# Altium PCB PCB_prod_disaster_counter_2_50_radius_2022-07-22.pcbdoc
Units mil, origin at the board's own origin, x right, y up, seen from the top; angles counter-clockwise.
Board outline 7840 x 6480 mil, 2 copper layers (Top Layer, Bottom Layer); 33 components, 24 nets, 108 pads, 4 vias.
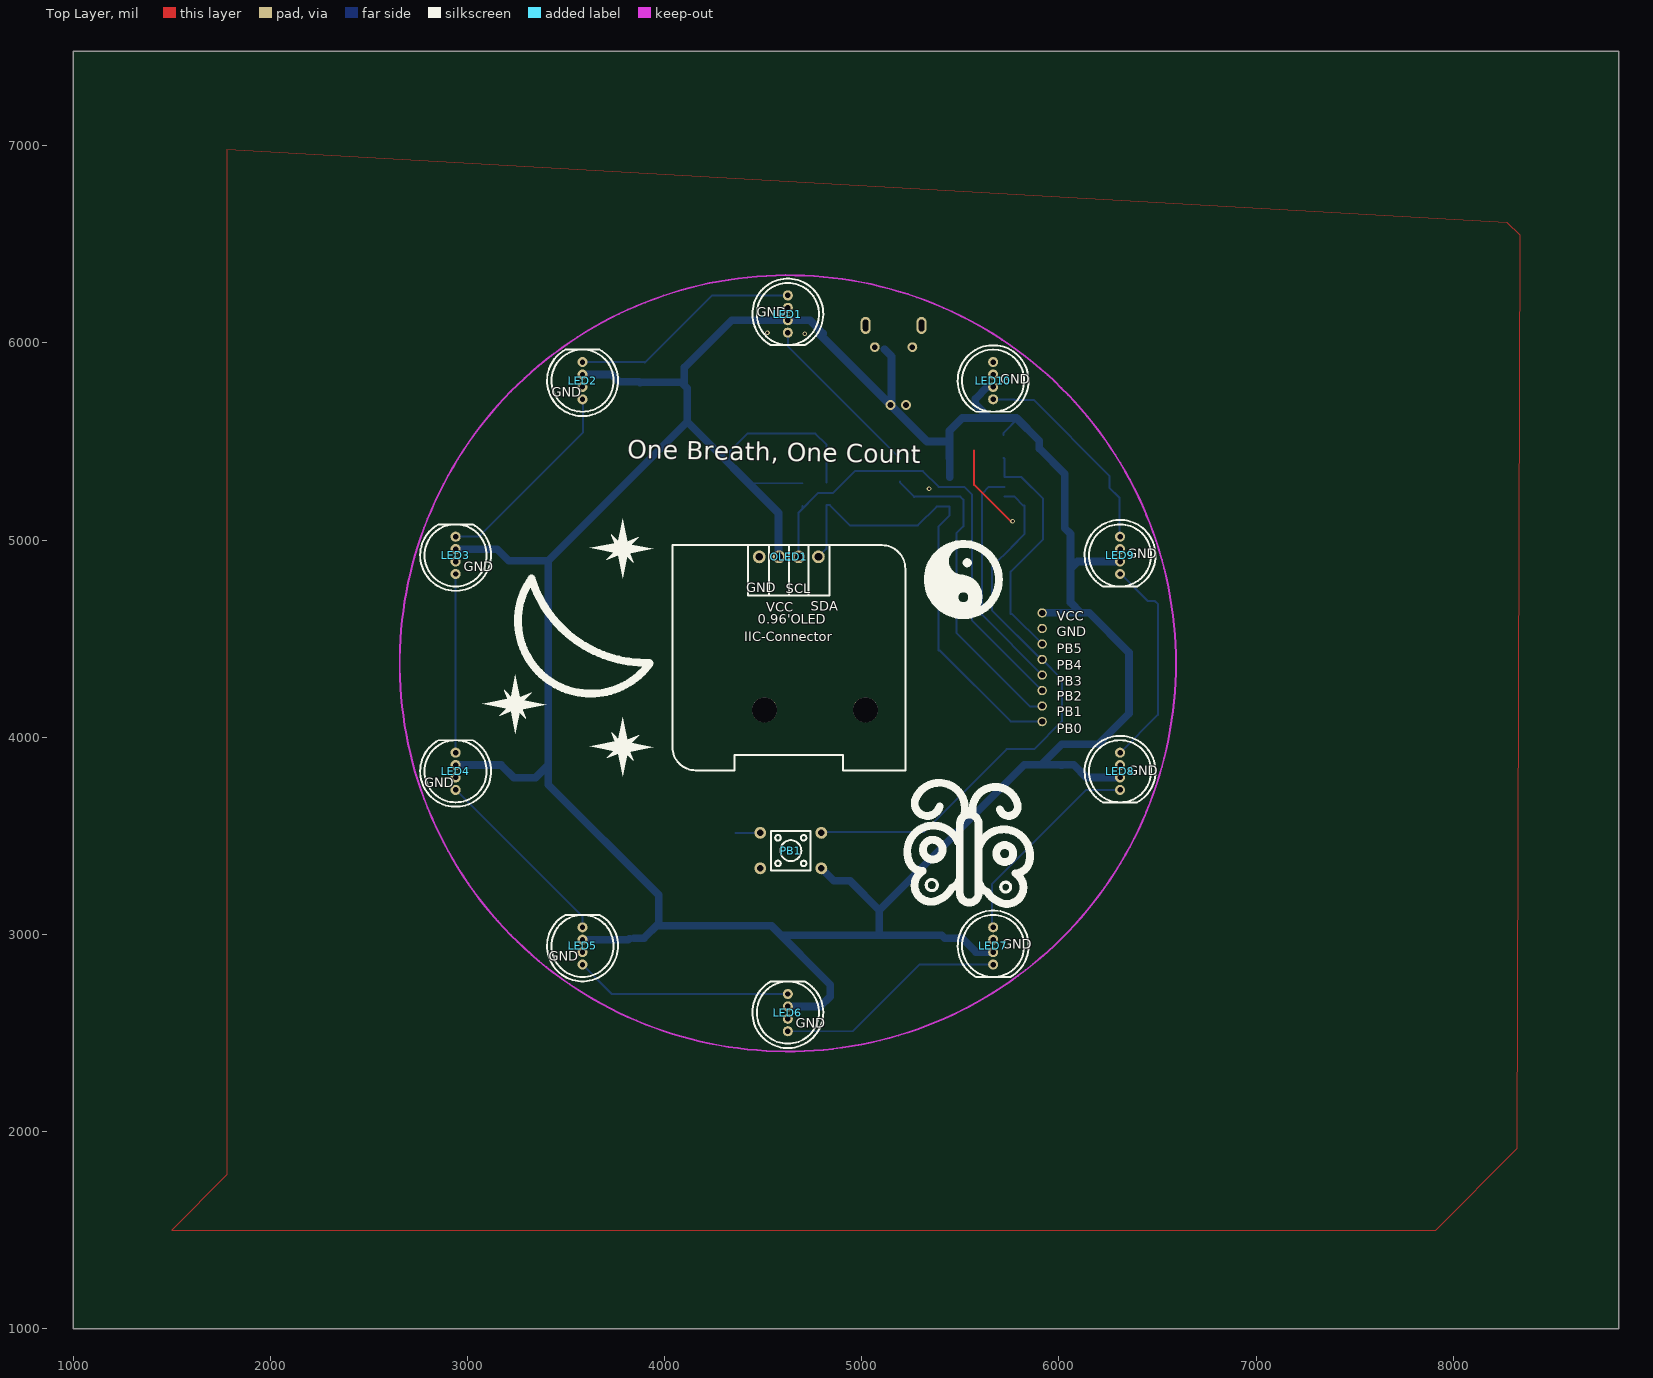
[diagram p0: Top Layer view]
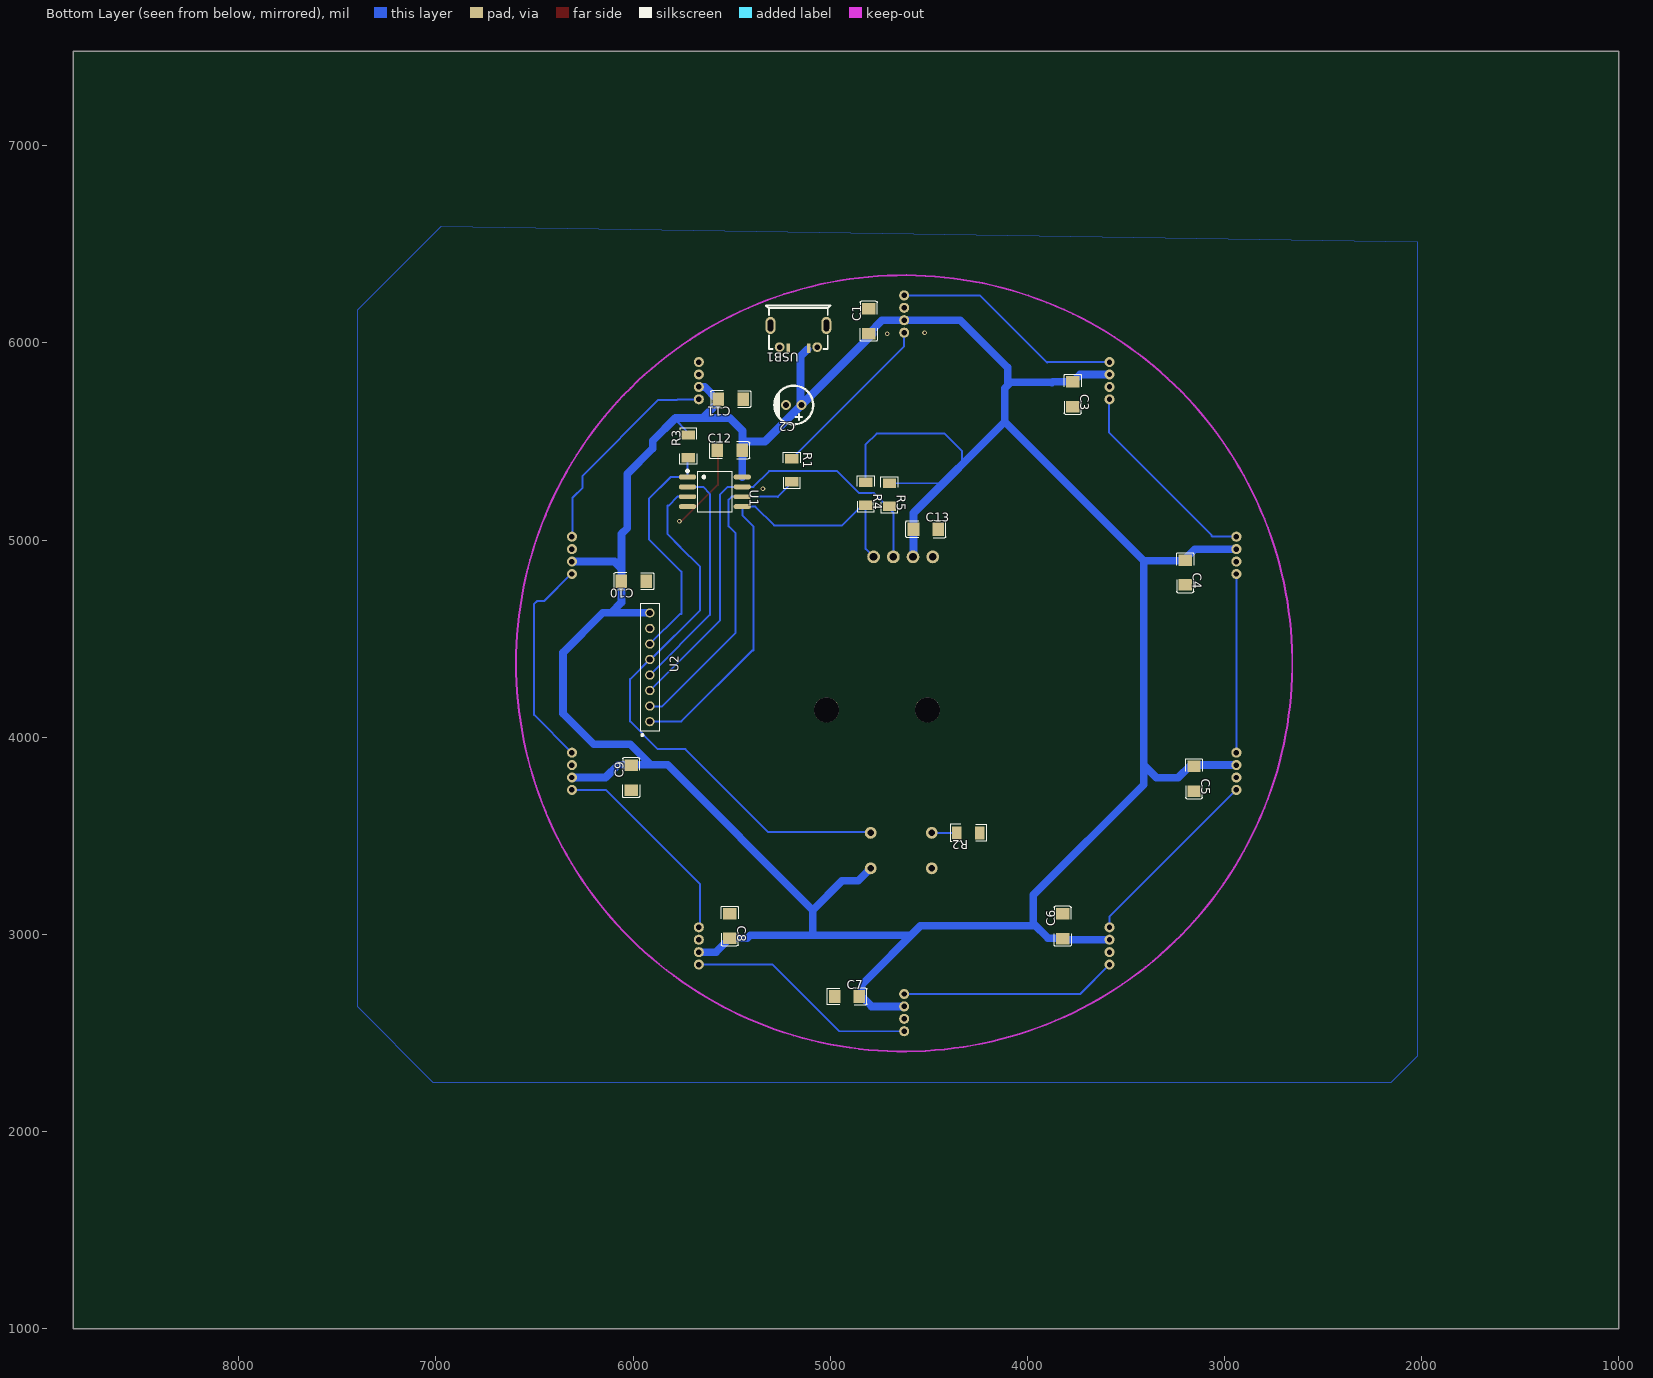
[diagram p1: Bottom Layer view, seen from below]

## Layer stack, top to bottom
Top Layer: signal copper (thickness not stored)
Dielectric: dielectric 12.6, FR-4, Dk 4.8
Bottom Layer: signal copper (thickness not stored)

## Board outline
8840,1000 1000,1000 1000,7480 8840,7480

## Components (designator, comment, footprint, x,y, rotation, side; value= is the part's Value field where it differs from the comment)
C1 "0.1u" C1206 4805,6110 r270 bottom
C2 "100 uF" CAP-D5.0×F2.0 5185,5685 r180 bottom
C3 "0.1u" C1206 3770,5740 r90 bottom
C4 "0.1u" C1206 3200,4835 r90 bottom
C5 "0.1u" C1206 3155,3790 r90 bottom
C6 "0.1u" C1206 3821.33,3041.03 r270 bottom
C7 "0.1u" C1206 4915,2685 r0 bottom
C8 "0.1u" C1206 5510,3042.7 r90 bottom
C9 "0.1u" C1206 6010,3795 r270 bottom
C10 "0.1u" C1206 5996.33,4791.03 r180 bottom
C11 "0.1u" C1206 5505,5715 r180 bottom
C12 "0.1u" C1206 5510,5455 r0 bottom
C13 "0.1u" C1206 4515,5055 r0 bottom
LED1 "WS2812D-F8" LED-TH_WS2812D-F8 4625,6146.65 r90 top
LED2 "WS2812D-F8" LED-TH_WS2812D-F8 3583.66,5808.46 r270 top
LED3 "WS2812D-F8" LED-TH_WS2812D-F8 2939.96,4922.64 r270 top
LED4 "WS2812D-F8" LED-TH_WS2812D-F8 2939.96,3827.36 r270 top
LED5 "WS2812D-F8" LED-TH_WS2812D-F8 3583.66,2941.54 r270 top
LED6 "WS2812D-F8" LED-TH_WS2812D-F8 4625,2603.35 r270 top
LED7 "WS2812D-F8" LED-TH_WS2812D-F8 5666.34,2941.54 r90 top
LED8 "WS2812D-F8" LED-TH_WS2812D-F8 6310.04,3827.36 r90 top
LED9 "WS2812D-F8" LED-TH_WS2812D-F8 6310.04,4922.64 r90 top
LED10 "WS2812D-F8" LED-TH_WS2812D-F8 5666.34,5808.46 r90 top
OLED1 "0.96OLED_4P_MODULE_JX" 0.96OLED_4P 4630,4915 r0 top
PB1 "PUSH BUTTON 6X6X5, TH" "PUSH BUTTON 6X6X5, TH" 4540,3525 r0 top
R1 "100Ohm" R1206 5195,5355 r90 bottom
R2 "10k Ohm" R1206 4300,3515 r180 bottom
R3 "10k Ohm" R1206 5720,5475 r270 bottom
R4 "10k" R1206 4820,5235 r90 bottom
R5 "10k" R1206 4700,5230 r90 bottom
U1 "ATTINY85-20SU" SOIC-8_L5.3-W5.3-P1.27-LS8.0-BL 5585,5245 r90 bottom
U2 "KH-2FH-1X8P-H4.3" CONN-TH_8P-P2.00_KINGHELM_KH-2FH-1X8P-H4.3 5915,4355 r270 bottom
USB1 "U-F-M5DD-W-L COPY" MICRO-USB-SMD_MICRO-USB-18-NO-MID 5161.33,6031.03 r180 bottom

## Footprints (in the part's own frame and the unit in brackets; to place one, negate y for a bottom-side part, rotate by r counter-clockwise, add the part's x,y. Pads: shape width x height; smd on the part's side, far side on the other; paste and mask are expansions set on the pad)
0.96OLED_4P [mm]
  round 1.65 hole 1: 1(-3.81,-0.001) 2(-1.27,0.002) 3(1.27,0.002) 4(3.81,0.002)
  silkscreen extent -15,-27.5 15,1.5
C1206 [mm]
  rect 1.485x1.728 smd: 1(1.593,0) 2(-1.593,0)
  silkscreen extent -2.56,-1.09 2.56,1.09
CAP-D5.0×F2.0 [mm]
  round 1.3 hole 0.8: 1(1,0) 2(-1,0)
  silkscreen extent -2.5,-2.5 2.5,2.5
CONN-TH_8P-P2.00_KINGHELM_KH-2FH-1X8P-H4.3 [mm]
  round 1.2 hole 0.8: 1(7,0) 2(5,0) 3(3,0) 4(1,0) 5(-1,0) 6(-3,0) 7(-5,0) 8(-7,0)
  silkscreen extent -8.25,-1.2 8.88,1.2
LED-TH_WS2812D-F8 [mm]
  round 1.3 hole 0.7: 1(-2.4,0) 2(-0.8,0) 3(0.8,0) 4(2.4,0)
  silkscreen extent -4,-4.56 4.56,4.56
MICRO-USB-SMD_MICRO-USB-18-NO-MID [mm]
  oval 1.3x2.2 hole 0.7 slot 1.5 at 90 deg: 0(-3.6,1.471) 0(3.6,1.471)
  round 1.25 hole 0.7: 0(-2.425,-1.329) 0(2.425,-1.329)
  rect 0.45x1.25 smd: 1(1.31,-1.471) 5(-1.29,-1.471)
  silkscreen extent -4.18,-1.56 4.12,4.03
"PUSH BUTTON 6X6X5, TH" [mil]
  round 60 hole 33.46: 1(-55,-10) 2(255,-10) 3(-55,-190) 4(255,-190)
  silkscreen extent 0,-200 200,0
R1206 [mil]
  rect 47.54x66.97 smd: 1(58.22,0) 2(-58.22,0)
  silkscreen extent -91,-42 91,42
SOIC-8_L5.3-W5.3-P1.27-LS8.0-BL [mm]
  oval 0.63x2.25 smd: 1(1.905,3.53) 2(0.635,3.53) 3(-0.635,3.53) 4(-1.905,3.53) 5(-1.905,-3.53) 6(-0.635,-3.53) 7(0.635,-3.53) 8(1.905,-3.53)
  silkscreen extent -2.64,-2.18 2.82,3.68

## Free pads (board coordinates)
  round 125.98 hole 125.98 unplated: ""(4506.89,4138.78) ""(5018.7,4138.78)

## Via types
v1: diameter 24, hole 12, Top Layer to Bottom Layer, tented both sides, 4 vias

## Nets (pads, with @x,y where several pads share a name; then routed paths per layer and width w, separated by ;. In a path a pad name is that pad's centre, name@x,y a point inside that pad or via, vN(x,y) a via of type N, cw(c..) or ccw(c..) an arc to the next point about the centre after c; other vN are vias at no path point)
GND: C1.2 C2.2 C3.2 C4.2 C5.2 C6.2 C7.1 C8.1 C9.1 C10.1 C11.1 C12.1 C13.2 LED1.3 LED2.3 LED3.3 LED4.3 LED5.3 LED6.3 LED7.3 LED8.3 LED9.3 LED10.3 OLED1.1 R2.1 U1.4 U2.7 USB1.0 USB1.5 | length 446
  Top Layer w10: 5570,5454.4 5570,5280 5755,5095 v1(5765,5095)
  other v1: 5341.33,5261.03 4711.33,6046.03 4521.33,6051.03
LED1_1: LED1.1 R1.1 | length 875
  Bottom Layer w10: LED1.1 4625,5983.22 R1.1
LED1_4: LED1.4 LED2.1 | length 1188
  Bottom Layer w10: LED2.1 3897.05,5902.95 3900,5900 4241.14,6241.14 LED1.4 ; LED2.1 LED2.1@3586.6,5900
LED2_4: LED2.4 LED3.1 | length 1036.1
  Bottom Layer w10: LED3.1 3062.12,5017.12 3065,5020 3065,5025 3585,5545 3585,5712.64 LED2.4
LED3_4: LED3.4 LED4.1 | length 906.3
  Bottom Layer w10: LED4.1 LED3.4
LED4_4: LED4.4 LED5.1 | length 963.5
  Bottom Layer w10: LED4.4 3583.67,3089.18 LED5.1
LED5_4: LED5.4 LED6.1 | length 1103.1
  Bottom Layer w10: LED5.4 3732.87,2697.84 LED6.1
LED6_4: LED6.4 LED7.1 | length 1181.4
  Bottom Layer w10: LED6.4 4953.86,2508.86 5292.05,2847.05 LED7.1
LED7_4: LED7.4 LED8.1 | length 1068.3
  Bottom Layer w10: LED7.4 5661.33,3041.03 5661.33,3256.03 6138.18,3732.88 LED8.1
LED8_4: LED8.4 LED9.1 | length 1087.7
  Bottom Layer w10: LED8.4 6501.33,4113.16 6501.33,4676.03 6486.33,4691.03 6451.33,4691.03 6314.22,4828.14 LED9.1
LED9_4: LED9.4 LED10.1 | length 1081.8
  Bottom Layer w10: LED10.1 5773.39,5713.97 5776.33,5711.03 5871.33,5711.03 6256.33,5326.03 6256.33,5266.03 6306.33,5216.03 6306.33,5020.82 LED9.4
LED10_4: LED10.4
PB1_1: PB1.1 R2.2 | length 126.8
  Bottom Layer w10: R2.2 PB1.1
PB1_3: PB1.3
S$5747: 
S$5751: 
S$6086: 
U1_1: R3.1 U1.1 U2.6 | length 1216.3
  Bottom Layer w10: R3.1 5723.98,5412.8 U1.1 5810,5320 5920,5210 5920,5005 5755,4840 5755,4625 5763.11,4625 U2.6
U1_2: U1.2 U2.4 | length 1174.2
  Bottom Layer w10: U1.2 5645,5270 5610,5235 5610,4620.6 U2.4
U1_3: PB1.2 U1.3 U2.5 | length 2893.5
  Bottom Layer w10: PB1.2 4798.58,3518.58 5313.58,3518.58 5735,3940 5875,3940 6015,4080 6015,4294.37 U2.5 5910.63,4394.37 5660,4645 5660,4660 5660,4865 5764.85,4969.85 ; U1.3 5775,5220 5820,5175 5825,5175 5825,5030 5760,4965
U1_5: OLED1.4 R4.2 U1.5 U2.1 | length 2413.1
  Bottom Layer w10: OLED1.4@4780,4915.05 4820,4955.05 R4.2 4838.17,5176.78 4939.95,5075 5285,5075 5380,5170 U1.5 5446,5126 5390,5070 5390,4440 5395,4440 5755,4080 U2.1
U1_6: R1.2 U1.6 U2.2 | length 1644.4
  Bottom Layer w10: R1.2 5195,5291.51 5266.51,5220 ; 5265,5218.49 5266.51,5220 ; U2.2 5911.85,4155 5855,4155 5480,4530 5480,5035 5515,5070 5515,5205 5500,5220 U1.6 5266.51,5220
U1_7: OLED1.3 R5.2 U1.7 U2.3 | length 2421.9
  Bottom Layer w10: OLED1.3@4680,4915.05 4680,5140 ; R5.2 4700,5160 4680,5140 ; U2.3 5560,4591.9 5560,5230 5520,5270 U1.7 5390,5270 5310,5350 4965,5350 4855,5240 4780,5240 4680,5140
VCC: C1.1 C2.1 C3.1 C4.1 C5.1 C6.1 C7.2 C8.2 C9.2 C10.2 C11.2 C12.2 C13.1 LED1.2 LED2.2 LED3.2 LED4.2 LED5.2 LED6.2 LED7.2 LED8.2 LED9.2 LED10.2 OLED1.2 PB1.4 R3.2 R4.1 R5.1 U1.8 U2.8 USB1.1 | length 17838.6
  Bottom Layer w10: 4331,5384 4331,5451 4420,5540 4765,5540 4820,5485 R4.1 ; 4385,5330 4426.78,5288.22 R5.1 ; R3.2 5720,5544.4 5795,5619.4
  Bottom Layer w39.37: LED4.2 3171.73,3858.87 3235,3795.6 3345,3795 3410,3860 ; LED3.2 3151.47,4954.13 3210,4895.6 3410,4895 ; LED5.2 3816.04,2973.04 C6.1 ; LED2.2 3732.74,5839.96 C3.1 3871.7,5802.7 3875,5799.4 4085,5800 4115,5770 4115,5600 ; C6.1@3845,2980.6 3895,2980 3970,3055 3970,3200 3410,3760 3410,3860 ; 3958.6,3043.6 4542.1,3043.6 4840,2744.4 4840,2685 4790,2634.9 LED6.2@4625,2634.9 ; 4100,5785 4100,5875 4340,6115 LED1.2@4625,6115.1 ; OLED1.2@4580,4915.05 4577.7,4917.35 C13.1 4577.7,5137.3 4115,5600 ; 4594.71,2995.63 5405,2995.63 5420.62,2980 C8.2 5579.96,2910.04 LED7.2 ; LED1.2 4737.15,6115.15 C1.1 ; C1.1@4785.63,6045 C2.1 5330.63,5500 5410.6,5500 5445.6,5500 ; PB1.4 4858.2,3271.8 4940,3271.8 5088.4,3123.4 ; 5088.4,2995.6 5088.4,3123.4 ; USB1.1@5115,5967.4 5151.3,5931 5151.3,5690.7 C2.1 ; U1.8 5445.6,5500 ; LED10.2 5637,5777 5575,5715 5575,5690 5645,5620 5785,5619.4 ; U2.8 6111.3,4631 ; C9.2 6012.3,3860 6075,3860 6140,3795.9 LED8.2 ; C9.2@6015,3859.4 5825,3860 ; LED9.2 6094.2,4891.13 6059.03,4855.96 C10.2 ; 3410,3860 3410,4895 ; 3410,4895 4115,5600 ; 5088.4,3123.4 5825,3860 ; 5445.6,5500 5445,5555 5509.4,5619.4 5785,5619.4 ; 5785,5619.4 5900,5504.4 5900,5465 6030,5335 6030,5060 6059.03,5030.97 C10.2 ; 5825,3860 5910,3860 6015,3965 6200,3965 6355,4120 6355,4429.62 6153.59,4631.03 6111.33,4631.03 6059.03,4683.33 C10.2

## Polygon pours and split planes (outlines as drawn)
GND on Top Layer (solid): 1780,6980 1780,1780 1500,1500 7910,1500 8325,1915 8340,6545 8275,6610
GND on Bottom Layer (solid): 2022.5,6512.5 2022.5,2382.5 2157.5,2247.5 7012.5,2247.5 7397.5,2632.5 7397.5,6167.5 6972.5,6592.5

## Keep-outs
Keep-Out Layer:
  circle w10: c4625,4375 r1968.5

## Silkscreen, mask and mechanical layers (free items; w line width, h text height)
Top Overlay:
  drawing of 78 lines, arcs and shapes, not listed
  text "GND" at 4466.33,6132.41 h47.24
  text "GND" at 5701.33,5792.41 h47.24
  text "GND" at 3426.33,5727.41 h47.24
  text "One Breath, One Count" at 3810,5385 h157.48 r359
  text "GND" at 6346.33,4907.41 h47.24
  text "GND" at 2981.33,4842.41 h47.24
  text "GND" at 4415,4736.38 h47.24
  text "SCL" at 4615,4731.38 h47.24
  text "SDA" at 4740,4641.38 h47.24
  text "VCC" at 4515,4636.38 h47.24
  text "VCC" at 5990,4591.38 h47.24
  text "GND" at 5990,4511.38 h47.24
  text "PB5" at 5990,4426.38 h47.24
  text "PB4" at 5990,4341.38 h47.24
  text "PB3" at 5990,4261.38 h47.24
  text "PB2" at 5990,4186.38 h47.24
  text "PB1" at 5990,4106.38 h47.24
  text "PB0" at 5990,4021.38 h47.24
  text "GND" at 6351.33,3807.41 h47.24
  text "GND" at 2781.33,3747.41 h47.24
  text "GND" at 5711.33,2927.41 h47.24
  text "GND" at 3411.33,2867.41 h47.24
  text "GND" at 4666.33,2527.41 h47.24

## Text inside footprints (layer, text, board x,y; h text height)
OLED1: Top Overlay "IIC-Connector" at 4403.4,4487.94 h47.24; Top Overlay "0.96'OLED" at 4472.6,4576.43 h47.24